# EAGLE board Adafruit T-Cobbler Plus (EAGLE 6.6.0)
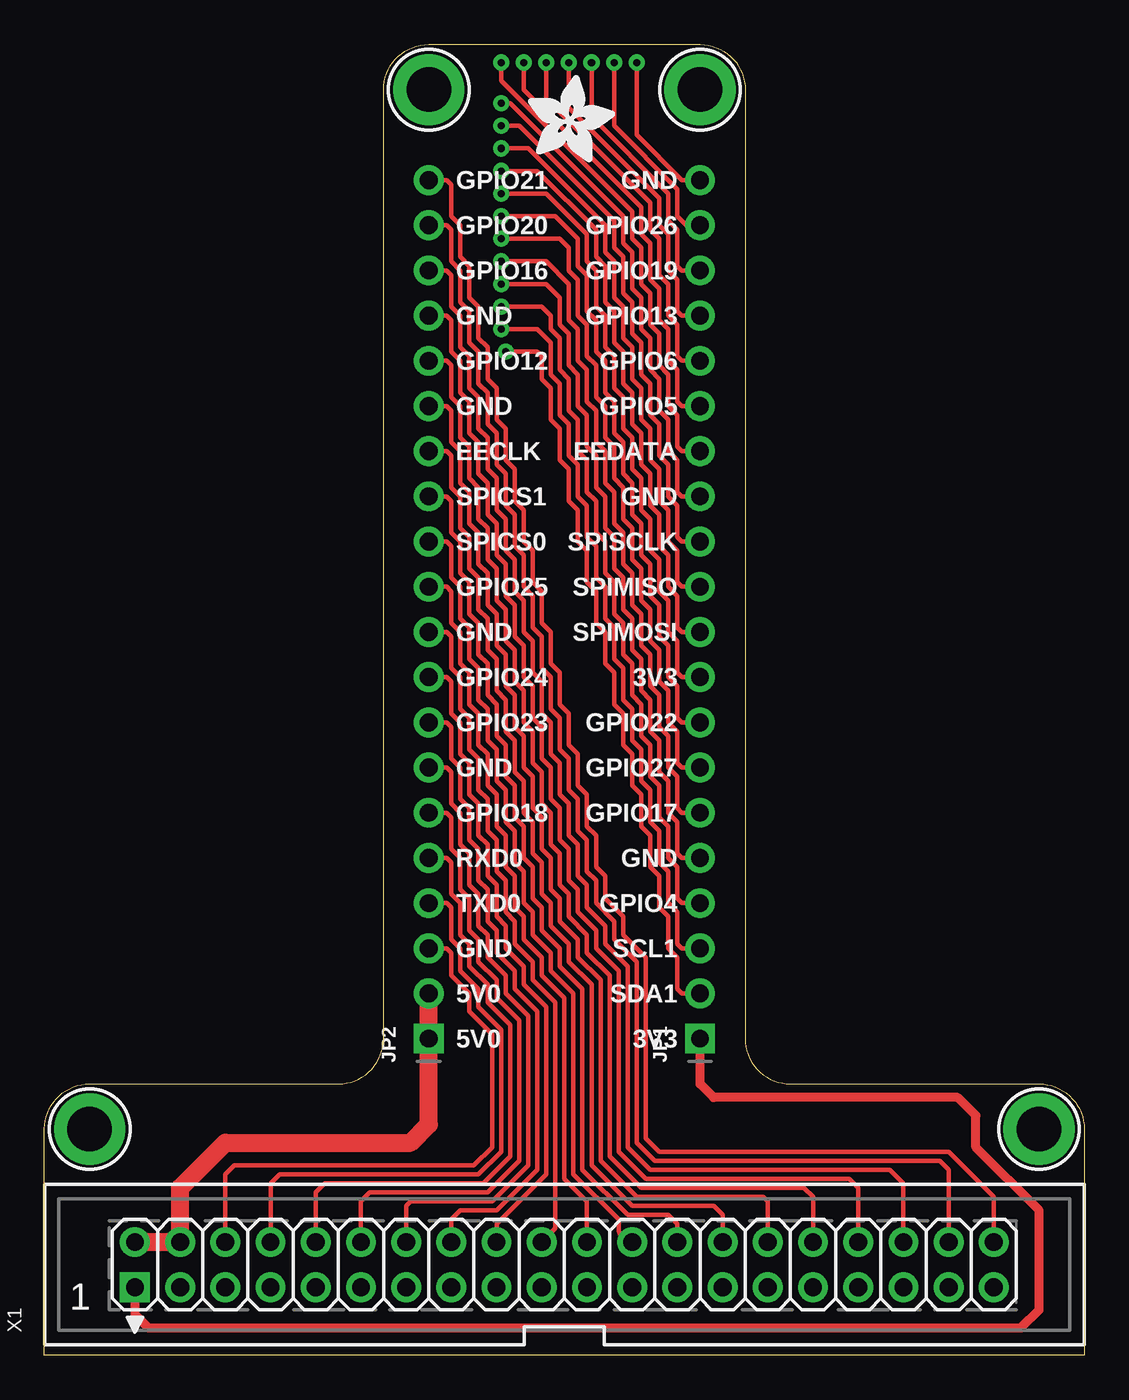
[diagram p0: board, top side]
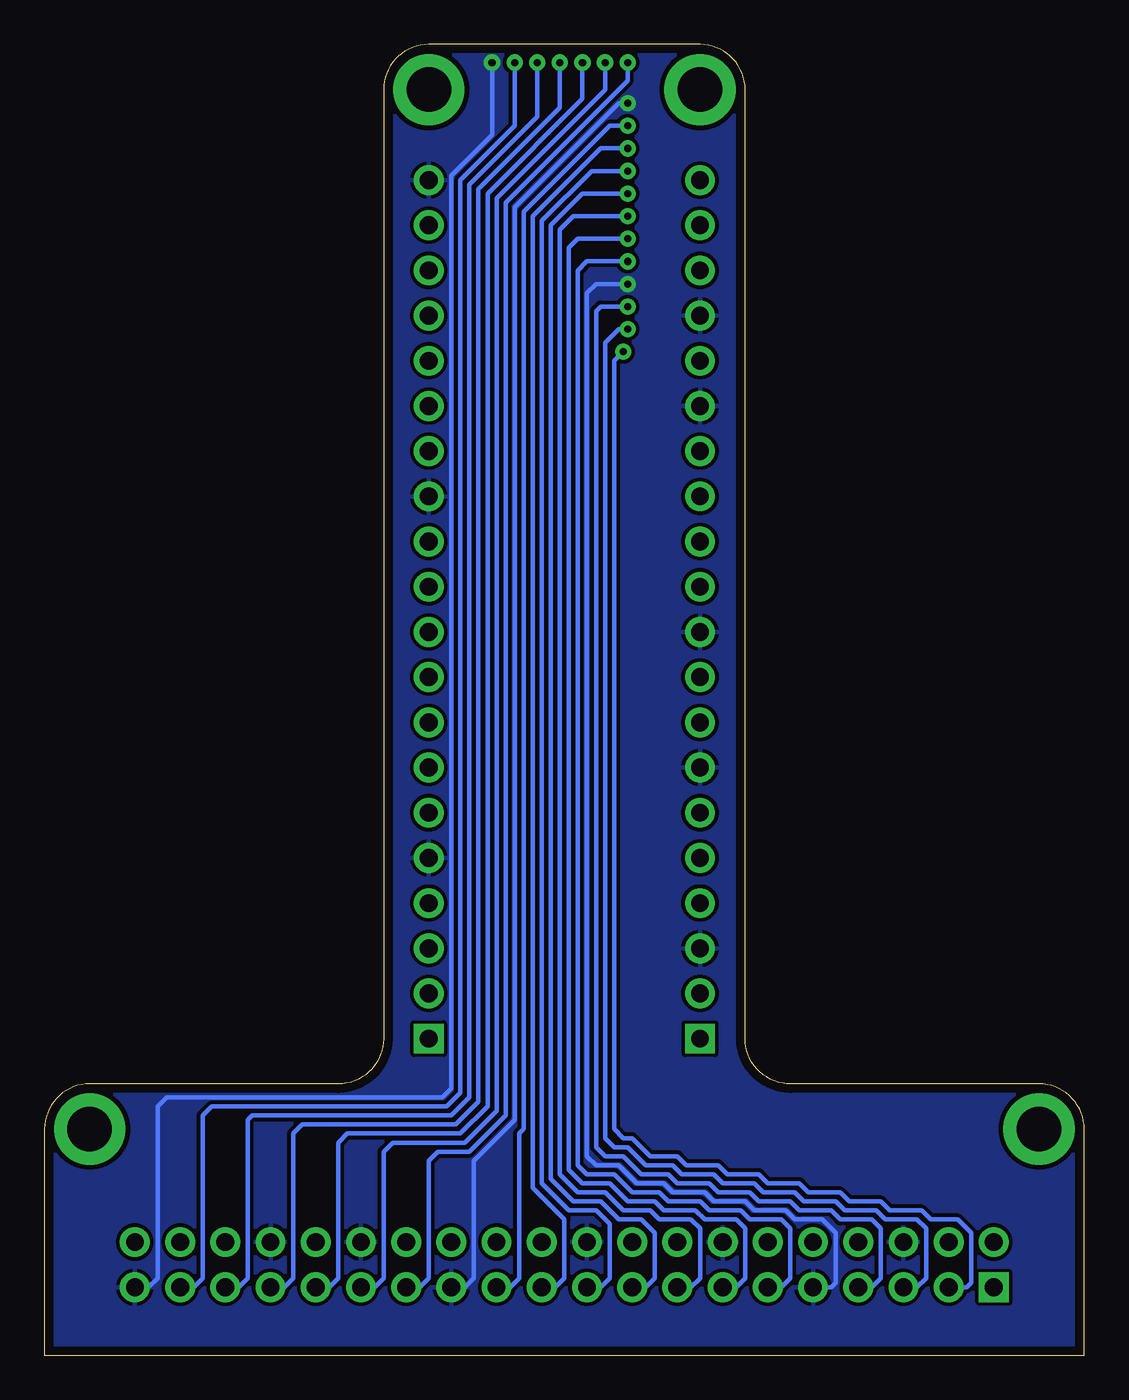
[diagram p1: board, bottom side, seen from below]

Size 58.42 x 73.66 mm. Coordinates in mm from the lower left corner, seen from the top.
Outline: 0,0 0,12.7 arc-90 2.54,15.24 16.51,15.24 arc90 19.05,17.78 19.05,71.12 arc-90 21.59,73.66 36.83,73.66 arc-90 39.37,71.12 39.37,17.78 arc90 41.91,15.24 55.88,15.24 arc-90 58.42,12.7 58.42,0 0,0
Copper layers (1*16): Top 0.035mm / dielectric 1.5mm / Bottom 0.035mm
Design rules "default": minimum track width 8mil, minimum drill 0.4mm, track to track 8mil, track to pad 8mil, pad to pad 8mil, via to via 8mil, smd to smd 8mil, copper to edge 20mil, drill to drill 8mil, minimum pad ring 8mil, minimum via ring 10mil, stop-mask expansion 3mil, vias tented up to drill 0mil, thermal gap 8mil

## Footprints (pad centres in the part's own frame; a part is rotated, then mirrored left to right if it is on the bottom)
1X20_ROUND = drill 1 pad 1.676 square: 1 -24.13,0 | drill 1 pad 1.676: 2 -21.59,0; 3 -19.05,0; 4 -16.51,0; 5 -13.97,0; 6 -11.43,0; 7 -8.89,0; 8 -6.35,0; 9 -3.81,0; 10 -1.27,0; 11 1.27,0; 12 3.81,0; 13 6.35,0; 14 8.89,0; 15 11.43,0; 16 13.97,0; 17 16.51,0; 18 19.05,0; 19 21.59,0; 20 24.13,0
MOUNTINGHOLE_2.5_PLATED_THICK = drill 2.5 pad 4: P$1 0,0
RASPBERRYPI_B+_IDC = drill 1 pad 1.676 square: 1 -1.27,24.13 | drill 1 pad 1.676: 2 1.27,24.13; 3 -1.27,21.59; 4 1.27,21.59; 5 -1.27,19.05; 6 1.27,19.05; 7 -1.27,16.51; 8 1.27,16.51; 9 -1.27,13.97; 10 1.27,13.97; 11 -1.27,11.43; 12 1.27,11.43; 13 -1.27,8.89; 14 1.27,8.89; 15 -1.27,6.35; 16 1.27,6.35; 17 -1.27,3.81; 18 1.27,3.81; 19 -1.27,1.27; 20 1.27,1.27; 21 -1.27,-1.27; 22 1.27,-1.27; 23 -1.27,-3.81; 24 1.27,-3.81; 25 -1.27,-6.35; 26 1.27,-6.35; 27 -1.27,-8.89; 28 1.27,-8.89; 29 -1.27,-11.43; 30 1.27,-11.43; 31 -1.27,-13.97; 32 1.27,-13.97; 33 -1.27,-16.51; 34 1.27,-16.51; 35 -1.27,-19.05; 36 1.27,-19.05; 37 -1.27,-21.59; 38 1.27,-21.59; 39 -1.27,-24.13; 40 1.27,-24.13

## Placement (x,y rotation side)
JP1  [1X20_ROUND]  36.83,41.91 90 top
JP2  [1X20_ROUND]  21.59,41.91 90 top
U$1  MOUNTINGHOLE2.5_THICK  [MOUNTINGHOLE_2.5_PLATED_THICK]  21.59,71.12 0 top
U$2  MOUNTINGHOLE2.5_THICK  [MOUNTINGHOLE_2.5_PLATED_THICK]  2.54,12.7 0 top
U$3  MOUNTINGHOLE2.5_THICK  [MOUNTINGHOLE_2.5_PLATED_THICK]  36.83,71.12 0 top
U$4  MOUNTINGHOLE2.5_THICK  [MOUNTINGHOLE_2.5_PLATED_THICK]  55.88,12.7 0 top
U$5  [ADAFRUIT_5MM]  27.18,67.06 0 top
X1  [RASPBERRYPI_B+_IDC]  29.21,5.08 90 top

## Library data of the parts
JP1 JP2 U$5 X1 = microbuilder
U$1-U$4 = microbuilder; BOM: EXCLUDE

## Nets
GND: JP1.5 JP1.13 JP1.20 JP2.3 JP2.7 JP2.10 JP2.15 JP2.17 X1.6 X1.9 X1.14 X1.20 X1.25 X1.30 X1.34 X1.39
N$1: JP2.1 JP2.2 X1.2 X1.4
N$4: JP2.4 X1.8
N$5: JP2.5 X1.10
N$6: JP2.6 X1.12
N$8: JP2.8 X1.16
N$9: JP2.9 X1.18
N$11: JP2.11 X1.22
N$12: JP2.12 X1.24
N$13: JP2.13 X1.26
N$14: JP2.14 X1.28
N$16: JP2.16 X1.32
N$18: JP2.18 X1.36
N$19: JP2.19 X1.38
N$20: JP2.20 X1.40
N$21: JP1.1 X1.1
N$22: JP1.2 X1.3
N$23: JP1.3 X1.5
N$24: JP1.4 X1.7
N$26: JP1.6 X1.11
N$27: JP1.7 X1.13
N$28: JP1.8 X1.15
N$29: JP1.9 X1.17
N$30: JP1.10 X1.19
N$31: JP1.11 X1.21
N$32: JP1.12 X1.23
N$34: JP1.14 X1.27
N$35: JP1.15 X1.29
N$36: JP1.16 X1.31
N$37: JP1.17 X1.33
N$38: JP1.18 X1.35
N$39: JP1.19 X1.37

## Tracks (layer width: path | path; a pad name or v marks a point on that pad's centre or on a via)
GND  (via drill 0.4)
  Top 0.254: v33.27,72.64 33.27,68.58 35.81,66.04 JP1.20 | JP1.13 35.81,48.26 35.56,48.51 35.56,50.29 35.05,50.8 35.05,52.58 34.54,53.09 34.54,54.86 34.04,55.37 34.04,57.15 33.53,57.66 33.53,59.44 33.02,59.94 33.02,61.98 32.51,62.48 32.51,64.01 26.16,70.36 v25.65,70.36 | v25.65,60.2 28.19,60.2 28.96,59.44 28.96,57.91 29.46,57.4 29.46,55.63 29.97,55.12 29.97,53.34 30.48,52.83 30.48,51.05 30.99,50.55 30.99,48.77 31.5,48.26 31.5,46.48 32,45.97 32,44.2 32.51,43.69 32.51,41.91 33.02,41.4 33.02,39.62 33.53,39.12 33.53,37.34 34.04,36.83 34.04,35.05 34.54,34.54 34.54,32.77 35.05,32.26 35.05,30.48 35.56,29.97 35.56,28.19 35.81,27.94 JP1.5 | X1.34 45.72,9.4 45.21,9.91 33.78,9.91 32.26,11.43 32.26,21.59 30.99,22.86 30.99,23.88 29.97,24.89 29.97,26.16 29.46,26.67 29.46,28.45 28.96,28.96 28.96,30.73 28.45,31.24 28.45,33.02 27.94,33.53 27.94,35.31 27.43,35.81 27.43,37.59 26.92,38.1 26.92,39.88 26.42,40.39 26.42,42.16 25.91,42.67 25.91,44.45 25.4,44.96 25.4,46.74 24.89,47.24 24.89,49.02 24.38,49.53 24.38,51.31 23.88,51.82 23.88,53.59 23.37,54.1 23.37,55.88 22.86,56.39 22.86,58.17 22.61,58.42 JP2.17 | X1.30 40.64,8.64 40.39,8.89 33.27,8.89 31.24,10.92 31.24,21.08 29.97,22.35 29.97,23.37 28.96,24.38 28.96,25.65 28.45,26.16 28.45,27.94 27.94,28.45 27.94,30.23 27.43,30.73 27.43,32.51 26.92,33.02 26.92,34.8 26.42,35.31 26.42,37.08 25.91,37.59 25.91,39.37 25.4,39.88 25.4,41.66 24.89,42.16 24.89,43.94 24.38,44.45 24.38,46.23 23.88,46.74 23.88,48.51 23.37,49.02 23.37,50.8 22.86,51.31 22.86,53.09 22.61,53.34 JP2.15 | X1.20 28.7,7.11 28.7,19.81 27.43,21.08 27.43,22.1 26.42,23.11 26.42,24.38 25.91,24.89 25.91,26.67 25.4,27.18 25.4,28.96 24.89,29.46 24.89,31.24 24.38,31.75 24.38,33.53 23.88,34.04 23.88,35.81 23.37,36.32 23.37,38.1 22.86,38.61 22.86,40.39 22.61,40.64 JP2.10
  Top 0.254: X1.14 20.32,8.38 20.57,8.64 25.15,8.64 27.18,10.67 27.18,19.05 25.91,20.32 25.91,21.34 24.89,22.35 24.89,23.62 24.38,24.13 24.38,25.91 23.88,26.42 23.88,28.19 23.37,28.7 23.37,30.48 22.86,30.99 22.86,32.77 22.61,33.02 JP2.7 | X1.6 10.16,10.16 10.67,10.67 24.13,10.67 25.15,11.68 25.15,18.03 23.88,19.3 23.88,20.32 22.86,21.34 22.86,22.61 22.61,22.86 JP2.3
  Bottom 0.254: X1.39 52.58,3.81 52.07,4.32 52.07,13.97 51.56,14.48 36.07,14.48 35.56,14.99 35.56,66.29 33.27,68.58 33.27,68.83 33.27,69.09 v33.27,72.64 | X1.25 34.8,3.81 34.29,4.32 34.29,10.92 32,13.21 32,64.52 26.16,70.36 v25.65,70.36 | X1.9 14.22,3.81 13.97,4.06 13.97,6.86 14.73,7.62 16.26,7.62 16.76,8.13 18.54,8.13 19.05,8.64 20.83,8.64 21.34,9.14 23.11,9.14 23.62,9.65 25.15,9.65 26.16,10.67 27.43,10.67 27.94,11.18 27.94,59.69 27.43,60.2 v25.65,60.2
  pour Bottom: 0,0 0,12.7 arc-90 2.54,15.24 16.51,15.24 arc90 19.05,17.78 19.05,71.12 arc-90 21.59,73.66 36.83,73.66 arc-90 39.37,71.12 39.37,17.78 arc90 41.91,15.24 55.88,15.24 arc-90 58.42,12.7 58.42,0
N$1
  Top 1.016: X1.2 X1.4 7.62,9.4 10.16,11.94 20.57,11.94 21.59,12.95 JP2.1 JP2.2
N$4
  Top 0.254: X1.8 12.7,9.65 13.21,10.16 24.38,10.16 25.65,11.43 25.65,18.29 24.38,19.56 24.38,20.57 23.37,21.59 23.37,22.86 22.86,23.37 22.86,25.15 22.61,25.4 JP2.4
N$5
  Top 0.254: X1.10 15.24,9.14 15.75,9.65 24.64,9.65 26.16,11.18 26.16,18.54 24.89,19.81 24.89,20.83 23.88,21.84 23.88,23.11 23.37,23.62 23.37,25.4 22.86,25.91 22.86,27.69 22.61,27.94 JP2.5
N$6
  Top 0.254: X1.12 17.78,8.64 18.29,9.14 24.89,9.14 26.67,10.92 26.67,18.8 25.4,20.07 25.4,21.08 24.38,22.1 24.38,23.37 23.88,23.88 23.88,25.65 23.37,26.16 23.37,27.94 22.86,28.45 22.86,30.23 22.61,30.48 JP2.6
N$8
  Top 0.254: X1.16 22.86,7.62 23.37,8.13 25.4,8.13 27.69,10.41 27.69,19.3 26.42,20.57 26.42,21.59 25.4,22.61 25.4,23.88 24.89,24.38 24.89,26.16 24.38,26.67 24.38,28.45 23.88,28.96 23.88,30.73 23.37,31.24 23.37,33.02 22.86,33.53 22.86,35.31 22.61,35.56 JP2.8
N$9
  Top 0.254: X1.18 25.4,7.37 28.19,10.16 28.19,19.56 26.92,20.83 26.92,21.84 25.91,22.86 25.91,24.13 25.4,24.64 25.4,26.42 24.89,26.92 24.89,28.7 24.38,29.21 24.38,30.99 23.88,31.5 23.88,33.27 23.37,33.78 23.37,35.56 22.86,36.07 22.86,37.85 22.61,38.1 JP2.9
N$11
  Top 0.254: X1.22 30.48,8.64 29.21,9.91 29.21,20.07 27.94,21.34 27.94,22.35 26.92,23.37 26.92,24.64 26.42,25.15 26.42,26.92 25.91,27.43 25.91,29.21 25.4,29.72 25.4,31.5 24.89,32 24.89,33.78 24.38,34.29 24.38,36.07 23.88,36.58 23.88,38.35 23.37,38.86 23.37,40.64 22.86,41.15 22.86,42.93 22.61,43.18 JP2.11
N$12
  Top 0.254: X1.24 arc-90 32.26,7.11 32.26,7.62 29.72,10.16 29.72,20.32 28.45,21.59 28.45,22.61 27.43,23.62 27.43,24.89 26.92,25.4 26.92,27.18 26.42,27.69 26.42,29.46 25.91,29.97 25.91,31.75 25.4,32.26 25.4,34.04 24.89,34.54 24.89,36.32 24.38,36.83 24.38,38.61 23.88,39.12 23.88,40.89 23.37,41.4 23.37,43.18 22.86,43.69 22.86,45.47 22.61,45.72 JP2.12
N$13
  Top 0.254: X1.26 35.56,7.37 35.05,7.87 32.77,7.87 30.23,10.41 30.23,20.57 28.96,21.84 28.96,22.86 27.94,23.88 27.94,25.15 27.43,25.65 27.43,27.43 26.92,27.94 26.92,29.72 26.42,30.23 26.42,32 25.91,32.51 25.91,34.29 25.4,34.8 25.4,36.58 24.89,37.08 24.89,38.86 24.38,39.37 24.38,41.15 23.88,41.66 23.88,43.43 23.37,43.94 23.37,45.72 22.86,46.23 22.86,48.01 22.61,48.26 JP2.13
N$14
  Top 0.254: X1.28 38.1,7.87 37.59,8.38 33.02,8.38 30.73,10.67 30.73,20.83 29.46,22.1 29.46,23.11 28.45,24.13 28.45,25.4 27.94,25.91 27.94,27.69 27.43,28.19 27.43,29.97 26.92,30.48 26.92,32.26 26.42,32.77 26.42,34.54 25.91,35.05 25.91,36.83 25.4,37.34 25.4,39.12 24.89,39.62 24.89,41.4 24.38,41.91 24.38,43.69 23.88,44.2 23.88,45.97 23.37,46.48 23.37,48.26 22.86,48.77 22.86,50.55 22.61,50.8 JP2.14
N$16
  Top 0.254: X1.32 43.18,8.89 42.67,9.4 33.53,9.4 31.75,11.18 31.75,21.34 30.48,22.61 30.48,23.62 29.46,24.64 29.46,25.91 28.96,26.42 28.96,28.19 28.45,28.7 28.45,30.48 27.94,30.99 27.94,32.77 27.43,33.27 27.43,35.05 26.92,35.56 26.92,37.34 26.42,37.85 26.42,39.62 25.91,40.13 25.91,41.91 25.4,42.42 25.4,44.2 24.89,44.7 24.89,46.48 24.38,46.99 24.38,48.77 23.88,49.28 23.88,51.05 23.37,51.56 23.37,53.34 22.86,53.85 22.86,55.63 22.61,55.88 JP2.16
N$18
  Top 0.254: X1.36 48.26,9.65 47.5,10.41 34.04,10.41 32.77,11.68 32.77,21.84 31.5,23.11 31.5,24.13 30.48,25.15 30.48,26.42 29.97,26.92 29.97,28.7 29.46,29.21 29.46,30.99 28.96,31.5 28.96,33.27 28.45,33.78 28.45,35.56 27.94,36.07 27.94,37.85 27.43,38.35 27.43,40.13 26.92,40.64 26.92,42.42 26.42,42.93 26.42,44.7 25.91,45.21 25.91,46.99 25.4,47.5 25.4,49.28 24.89,49.78 24.89,51.56 24.38,52.07 24.38,53.85 23.88,54.36 23.88,56.13 23.37,56.64 23.37,58.42 22.86,58.93 22.86,60.71 22.61,60.96 JP2.18
N$19
  Top 0.254: X1.38 50.8,10.41 50.29,10.92 34.29,10.92 33.27,11.94 33.27,22.1 32,23.37 32,24.38 30.99,25.4 30.99,26.67 30.48,27.18 30.48,28.96 29.97,29.46 29.97,31.24 29.46,31.75 29.46,33.53 28.96,34.04 28.96,35.81 28.45,36.32 28.45,38.1 27.94,38.61 27.94,40.39 27.43,40.89 27.43,42.67 26.92,43.18 26.92,44.96 26.42,45.47 26.42,47.24 25.91,47.75 25.91,49.53 25.4,50.04 25.4,51.82 24.89,52.32 24.89,54.1 24.38,54.61 24.38,56.39 23.88,56.9 23.88,58.67 23.37,59.18 23.37,60.96 22.86,61.47 22.86,63.25 22.61,63.5 JP2.19
N$20
  Top 0.254: JP2.20 22.61,66.04 22.86,65.79 22.86,64.01 23.37,63.5 23.37,61.72 23.88,61.21 23.88,59.44 24.38,58.93 24.38,57.15 24.89,56.64 24.89,54.86 25.4,54.36 25.4,52.58 25.91,52.07 25.91,50.29 26.42,49.78 26.42,48.01 26.92,47.5 26.92,45.72 27.43,45.21 27.43,43.43 27.94,42.93 27.94,41.15 28.45,40.64 28.45,38.86 28.96,38.35 28.96,36.58 29.46,36.07 29.46,34.29 29.97,33.78 29.97,32 30.48,31.5 30.48,29.72 30.99,29.21 30.99,27.43 31.5,26.92 31.5,25.65 32.51,24.64 32.51,23.62 33.78,22.35 33.78,12.19 34.54,11.43 50.8,11.43 53.34,8.89 X1.40
N$21
  Top 0.508: X1.1 5.08,2.29 5.84,1.52 54.86,1.52 55.88,2.54 55.88,8.13 52.32,11.68 52.32,13.46 51.31,14.48 37.59,14.48 36.83,15.24 JP1.1
N$22  (via drill 0.4)
  Top 0.254: v25.91,56.39 27.69,56.39 27.94,56.13 27.94,54.86 28.45,54.36 28.45,52.58 28.96,52.07 28.96,50.29 29.46,49.78 29.46,48.01 29.97,47.5 29.97,45.72 30.48,45.21 30.48,43.43 30.99,42.93 30.99,41.15 31.5,40.64 31.5,38.86 32,38.35 32,36.58 32.51,36.07 32.51,34.29 33.02,33.78 33.02,32 33.53,31.5 33.53,29.72 34.04,29.21 34.04,27.43 34.54,26.92 34.54,25.15 35.05,24.64 35.05,22.86 35.56,22.35 35.56,20.57 35.81,20.32 JP1.2
  Bottom 0.254: X1.3 6.6,3.81 6.35,4.06 6.35,6.86 7.11,7.62 8.64,7.62 9.14,8.13 10.92,8.13 11.43,8.64 13.21,8.64 13.72,9.14 15.49,9.14 16,9.65 17.78,9.65 18.29,10.16 20.07,10.16 20.57,10.67 22.35,10.67 22.86,11.18 24.38,11.18 25.4,12.19 25.91,12.19 26.42,12.7 26.42,55.88 v25.91,56.39
N$23  (via drill 0.4)
  Top 0.254: v25.65,57.66 27.69,57.66 28.45,56.9 28.45,55.12 28.96,54.61 28.96,52.83 29.46,52.32 29.46,50.55 29.97,50.04 29.97,48.26 30.48,47.75 30.48,45.97 30.99,45.47 30.99,43.69 31.5,43.18 31.5,41.4 32,40.89 32,39.12 32.51,38.61 32.51,36.83 33.02,36.32 33.02,34.54 33.53,34.04 33.53,32.26 34.04,31.75 34.04,29.97 34.54,29.46 34.54,27.69 35.05,27.18 35.05,25.4 35.56,24.89 35.56,23.11 35.81,22.86 JP1.3
  Bottom 0.254: X1.5 9.4,3.81 8.89,4.32 8.89,7.11 9.4,7.62 11.18,7.62 11.68,8.13 13.46,8.13 13.97,8.64 15.75,8.64 16.26,9.14 18.03,9.14 18.54,9.65 20.32,9.65 20.83,10.16 22.61,10.16 23.11,10.67 24.64,10.67 25.65,11.68 26.42,11.68 26.92,12.19 26.92,56.9 26.16,57.66 v25.65,57.66
N$24  (via drill 0.4)
  Top 0.254: v25.65,58.93 27.94,58.93 28.45,58.42 28.45,57.66 28.96,57.15 28.96,55.37 29.46,54.86 29.46,53.09 29.97,52.58 29.97,50.8 30.48,50.29 30.48,48.51 30.99,48.01 30.99,46.23 31.5,45.72 31.5,43.94 32,43.43 32,41.66 32.51,41.15 32.51,39.37 33.02,38.86 33.02,37.08 33.53,36.58 33.53,34.8 34.04,34.29 34.04,32.51 34.54,32 34.54,30.23 35.05,29.72 35.05,27.94 35.56,27.43 35.56,25.65 35.81,25.4 JP1.4
  Bottom 0.254: X1.7 11.94,3.81 11.43,4.32 11.43,7.11 11.94,7.62 13.72,7.62 14.22,8.13 16,8.13 16.51,8.64 18.29,8.64 18.8,9.14 20.57,9.14 21.08,9.65 22.86,9.65 23.37,10.16 24.89,10.16 25.91,11.18 26.92,11.18 27.43,11.68 27.43,58.67 27.18,58.93 v25.65,58.93
N$26  (via drill 0.4)
  Top 0.254: v25.65,61.47 28.19,61.47 29.46,60.2 29.46,58.17 29.97,57.66 29.97,55.88 30.48,55.37 30.48,53.59 30.99,53.09 30.99,51.31 31.5,50.8 31.5,49.02 32,48.51 32,46.74 32.51,46.23 32.51,44.45 33.02,43.94 33.02,42.16 33.53,41.66 33.53,39.88 34.04,39.37 34.04,37.59 34.54,37.08 34.54,35.31 35.05,34.8 35.05,33.02 35.56,32.51 35.56,30.73 35.81,30.48 JP1.6
  Bottom 0.254: X1.11 17.02,3.81 16.51,4.32 16.51,7.11 17.02,7.62 18.8,7.62 19.3,8.13 21.08,8.13 21.59,8.64 23.37,8.64 23.88,9.14 25.4,9.14 26.42,10.16 27.94,10.16 28.45,10.67 28.45,60.96 27.94,61.47 v25.65,61.47
N$27  (via drill 0.4)
  Top 0.254: v25.65,62.74 28.96,62.74 29.46,62.23 29.46,60.96 29.97,60.45 29.97,58.42 30.48,57.91 30.48,56.13 30.99,55.63 30.99,53.85 31.5,53.34 31.5,51.56 32,51.05 32,49.28 32.51,48.77 32.51,46.99 33.02,46.48 33.02,44.7 33.53,44.2 33.53,42.42 34.04,41.91 34.04,40.13 34.54,39.62 34.54,37.85 35.05,37.34 35.05,35.56 35.56,35.05 35.56,33.27 35.81,33.02 JP1.7
  Bottom 0.254: X1.13 19.56,3.81 19.05,4.32 19.05,7.11 19.56,7.62 21.34,7.62 21.84,8.13 23.62,8.13 24.13,8.64 25.65,8.64 26.67,9.65 28.19,9.65 28.96,10.41 28.96,62.23 28.45,62.74 v25.65,62.74
N$28  (via drill 0.4)
  Top 0.254: v25.65,64.01 28.7,64.01 29.97,62.74 29.97,61.21 30.48,60.71 30.48,58.67 30.99,58.17 30.99,56.39 31.5,55.88 31.5,54.1 32,53.59 32,51.82 32.51,51.31 32.51,49.53 33.02,49.02 33.02,47.24 33.53,46.74 33.53,44.96 34.04,44.45 34.04,42.67 34.54,42.16 34.54,40.39 35.05,39.88 35.05,38.1 35.56,37.59 35.56,35.81 35.81,35.56 JP1.8
  Bottom 0.254: X1.15 22.1,3.81 21.59,4.32 21.59,7.11 22.1,7.62 23.88,7.62 24.38,8.13 25.91,8.13 26.92,9.14 28.45,9.14 29.46,10.16 29.46,63.25 28.7,64.01 v25.65,64.01
N$29  (via drill 0.4)
  Top 0.254: v25.65,65.28 28.19,65.28 30.48,62.99 30.48,61.47 30.99,60.96 30.99,58.93 31.5,58.42 31.5,56.64 32,56.13 32,54.36 32.51,53.85 32.51,52.07 33.02,51.56 33.02,49.78 33.53,49.28 33.53,47.5 34.04,46.99 34.04,45.21 34.54,44.7 34.54,42.93 35.05,42.42 35.05,40.64 35.56,40.13 35.56,38.35 35.81,38.1 JP1.9
  Bottom 0.254: X1.17 24.64,3.81 24.13,4.32 24.13,6.86 24.89,7.62 26.16,7.62 27.18,8.64 28.7,8.64 29.97,9.91 29.97,63.5 28.19,65.28 v25.65,65.28
N$30  (via drill 0.4)
  Top 0.254: v25.65,66.55 27.69,66.55 30.99,63.25 30.99,61.72 31.5,61.21 31.5,59.18 32,58.67 32,56.9 32.51,56.39 32.51,54.61 33.02,54.1 33.02,52.32 33.53,51.82 33.53,50.04 34.04,49.53 34.04,47.75 34.54,47.24 34.54,45.47 35.05,44.96 35.05,43.18 35.56,42.67 35.56,40.89 35.81,40.64 JP1.10
  Bottom 0.254: X1.19 27.18,3.81 26.67,4.32 26.67,7.37 27.43,8.13 28.96,8.13 30.48,9.65 30.48,63.75 27.69,66.55 v25.65,66.55
N$31  (via drill 0.4)
  Top 0.254: v25.65,67.82 27.18,67.82 31.5,63.5 31.5,61.98 32,61.47 32,59.44 32.51,58.93 32.51,57.15 33.02,56.64 33.02,54.86 33.53,54.36 33.53,52.58 34.04,52.07 34.04,50.29 34.54,49.78 34.54,48.01 35.05,47.5 35.05,45.72 35.56,45.21 35.56,43.43 35.81,43.18 JP1.11
  Bottom 0.254: X1.21 29.72,3.81 29.21,4.32 29.21,7.62 30.99,9.4 30.99,64.01 27.18,67.82 v25.65,67.82
N$32  (via drill 0.4)
  Top 0.254: v25.65,69.09 26.67,69.09 32,63.75 32,62.23 32.51,61.72 32.51,59.69 33.02,59.18 33.02,57.4 33.53,56.9 33.53,55.12 34.04,54.61 34.04,52.83 34.54,52.32 34.54,50.55 35.05,50.04 35.05,48.26 35.56,47.75 35.56,45.97 35.81,45.72 JP1.12
  Bottom 0.254: X1.23 32.26,3.81 31.75,4.32 31.75,12.45 31.5,12.7 31.5,64.26 26.67,69.09 v25.65,69.09
N$34  (via drill 0.4)
  Top 0.254: v25.65,72.64 25.65,71.63 33.02,64.26 33.02,62.74 33.53,62.23 33.53,60.2 34.04,59.69 34.04,57.91 34.54,57.4 34.54,55.63 35.05,55.12 35.05,53.34 35.56,52.83 35.56,51.05 35.81,50.8 JP1.14
  Bottom 0.254: X1.27 37.34,3.81 36.83,4.32 36.83,10.92 36.32,11.43 34.54,11.43 32.51,13.46 32.51,64.77 25.65,71.63 v25.65,72.64
N$35  (via drill 0.4)
  Top 0.254: v26.92,72.64 26.92,71.12 33.53,64.52 33.53,62.99 34.04,62.48 34.04,60.45 34.54,59.94 34.54,58.17 35.05,57.66 35.05,55.88 35.56,55.37 35.56,53.59 35.81,53.34 JP1.15
  Bottom 0.254: X1.29 39.88,3.81 39.37,4.32 39.37,11.43 38.86,11.94 34.8,11.94 33.02,13.72 33.02,65.02 26.92,71.12 v26.92,72.64
N$36  (via drill 0.4)
  Top 0.254: v28.19,72.64 28.19,70.61 34.04,64.77 34.04,63.25 34.54,62.74 34.54,60.71 35.05,60.2 35.05,58.42 35.56,57.91 35.56,56.13 35.81,55.88 JP1.16
  Bottom 0.254: X1.31 42.42,3.81 41.91,4.32 41.91,11.94 41.4,12.45 35.05,12.45 33.53,13.97 33.53,65.28 28.19,70.61 v28.19,72.64
N$37  (via drill 0.4)
  Top 0.254: v29.46,72.64 29.46,70.1 34.54,65.02 34.54,63.5 35.05,62.99 35.05,60.96 35.56,60.45 35.56,58.67 35.81,58.42 JP1.17
  Bottom 0.254: X1.33 44.96,3.81 44.45,4.32 44.45,12.45 43.94,12.95 35.31,12.95 34.04,14.22 34.04,65.53 29.46,70.1 v29.46,72.64
N$38  (via drill 0.4)
  Top 0.254: v30.73,72.64 30.73,69.6 35.05,65.28 35.05,63.75 35.56,63.25 35.56,61.21 35.81,60.96 JP1.18
  Bottom 0.254: X1.35 47.5,3.81 46.99,4.32 46.99,13.21 46.74,13.46 35.56,13.46 34.54,14.48 34.54,65.79 30.73,69.6 v30.73,72.64
N$39  (via drill 0.4)
  Top 0.254: v32,72.64 32,69.09 35.56,65.53 35.56,64.01 36.07,63.5 JP1.19
  Bottom 0.254: X1.37 50.04,3.81 49.53,4.32 49.53,13.46 49.02,13.97 35.81,13.97 35.05,14.73 35.05,66.04 32,69.09 v32,72.64

## Text on the board
tPlace: GPIO21 | GND | GPIO20 | GPIO26 | GPIO16 | GPIO19 | GND | GPIO13 | GPIO12 | GPIO6 | GND | GPIO5 | EECLK | EEDATA | SPICS1 | GND | SPICS0 | SPISCLK | GPIO25 | SPIMISO | GND | SPIMOSI | GPIO24 | 3V3 | GPIO23 | GPIO22 | GND | GPIO27 | GPIO18 | GPIO17 | RXD0 | GND | TXD0 | GPIO4 | GND | SCL1 | 5V0 | SDA1 | 5V0 | 3V3